# Altium PCB OnkoV1_K.PcbDoc
Units mil, origin at the board's own origin, x right, y up, seen from the top; angles counter-clockwise.
Board outline 5157.48 x 3228.35 mil, 2 copper layers (Top Layer, Bottom Layer); 141 components, 107 nets, 447 pads, 28 vias.
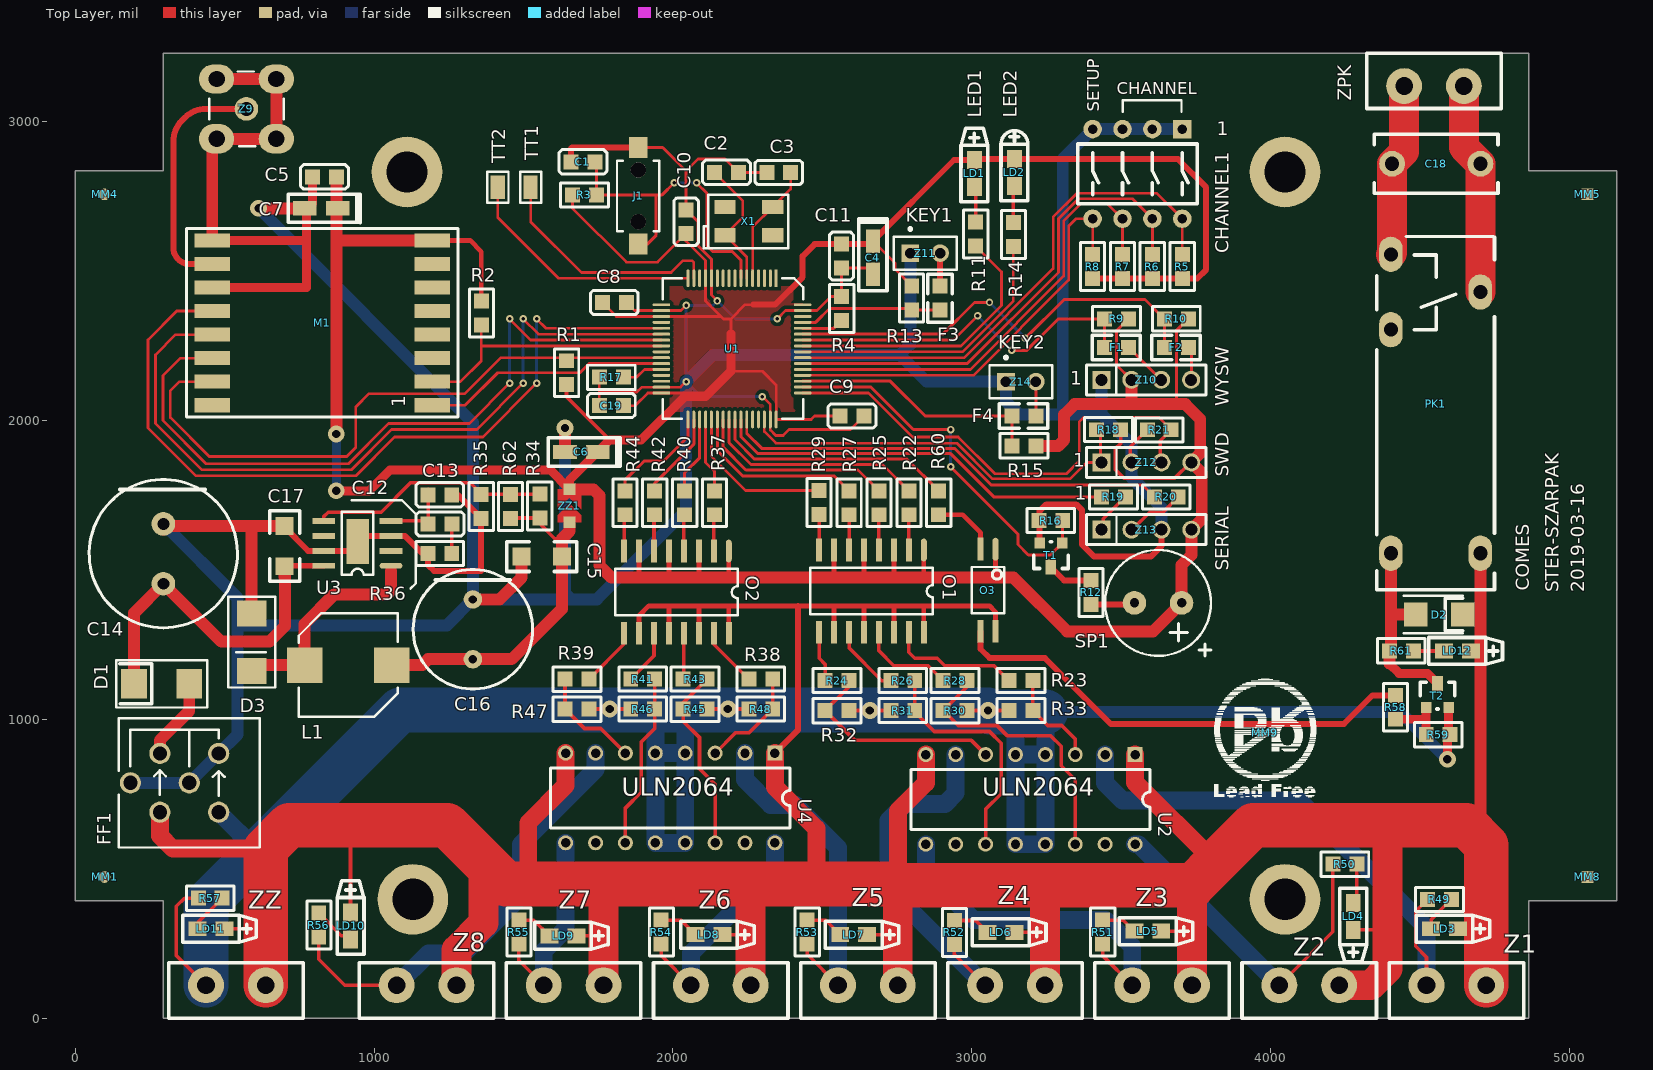
[diagram p0: Top Layer view]
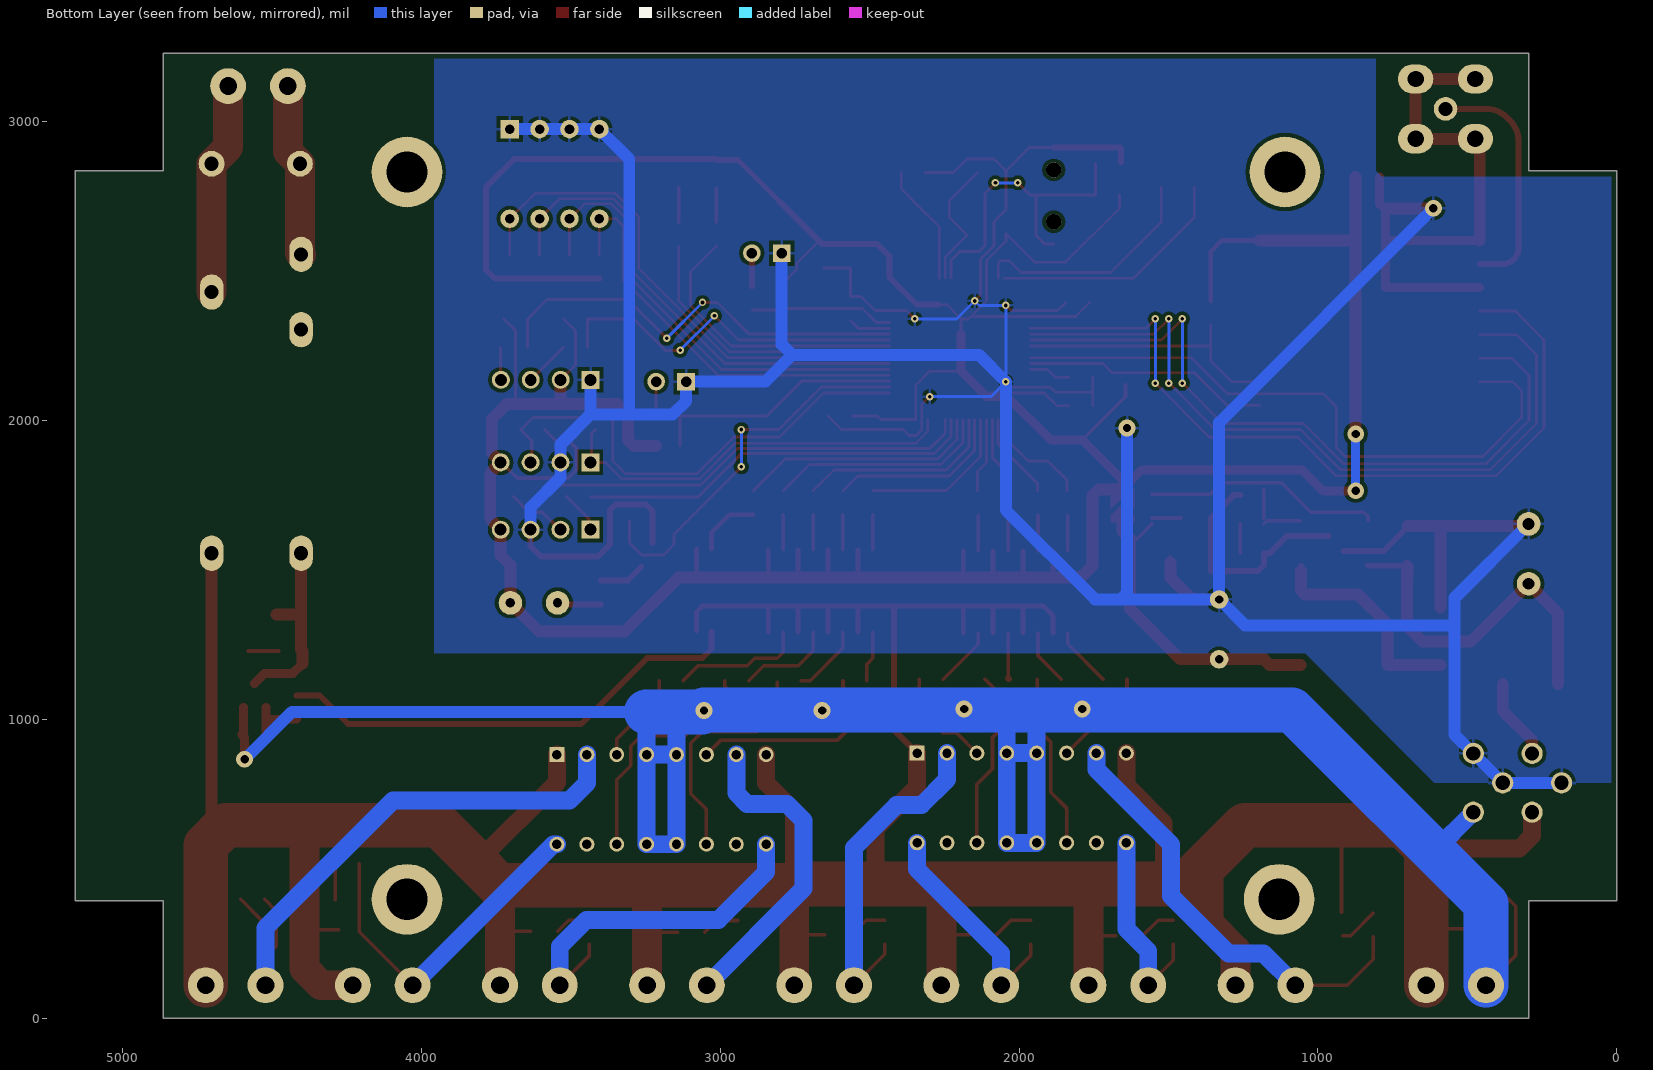
[diagram p1: Bottom Layer view, seen from below]

## Layer stack, top to bottom
Top Layer: signal copper 1.4
Dielectric: dielectric 12.6, FR-4, Dk 4.8
Bottom Layer: signal copper 1.4

## Board outline
295.28,0 295.28,393.7 0,393.7 0,2834.65 295.28,2834.65 295.28,3228.35 4862.2,3228.35 4862.2,2834.65 5157.48,2834.65 5157.48,393.7 4862.2,393.7 4862.2,0

## Design rules (kind name [scope] priority, off if disabled: settings)
Clearance Clearance_Poly [InPolygon vs not (InPolygon)] p1: gap=12
Clearance [All] p2: gap=8
ComponentClearance [All] p1 off: gap=10 collisioncheckmode=3 verticalgap=10 showdistances=FALSE
HoleSize [All] p1: absolutevalues=TRUE maxlimit=196.85 minlimit=11.81 maxpercent=80.000 minpercent=20.000
MinimumSolderMaskSliver [All] p1: minsoldermaskwidth=6
PolygonConnect [All] p1: connectstyle=Relief reliefconductorwidth=10 reliefentries=4 polygonreliefangle="90 Angle"
RoutingVias [All] p1: holewidth=12 width=25 viastyle="Through Hole" minholewidth=12 minwidth=25 maxholewidth=40 maxwidth=100
SilkToSilkClearance [All] p1: silktosilkclearance=6
SilkscreenOverComponentPads [All] p1: minsilkscreentomaskgap=4
SolderMaskExpansion [All] p1: expansion=4
Width [All] p1: maxlimit=200 minlimit=9 preferedwidth=10 toplayer_prefwidth=9 bottomlayer_minwidth=10 minimp=50.000000 maximp=50.000000 favimp=50.000000
23 further rules are at their usual default settings.

## Components (designator, comment, footprint, x,y, rotation, side; value= is the part's Value field where it differs from the comment)
C1 "10n" 0805C 1658.74,2864.17 r0 top
C2 "12pF" 0805C 2138.74,2829.17 r0 top
C3 "12pF" 0805C 2393.74,2829.17 r180 top
C4 "10u/6.3V" CAP_A 2668.74,2488.94 r90 top
C5 "100n" 0805C 793.74,2814.17 r0 top
C6 "10u/6V" CAP_A 1638.74,1894.17 r0 top
C7 "10u/6V" CAP_A 768.74,2709.17 r0 top
C8 "100n" 0805C 1843.74,2394.17 r180 top
C9 "100n" 0805C 2558.74,2014.17 r0 top
C10 "100n" 0805C 2043.74,2704.17 r270 top
C11 "100n" 0805C 2563.74,2509.17 r90 top
C12 "22nF" 0805C 1261.1,1653.54 r180 top
C13 "470p" 0805C 1179.84,1750.71 r0 top
C14 "1000uF/35" RB-.5/.2 295.28,1653.54 r270 top
C15 "4.7uF/16V" 1206 1493.61,1544.39 r0 top
C16 "1000uF/10V" RB-.2/.4 1330.71,1400.79 r90 top
C17 "10uF/35V" 1206 701,1646.94 r270 top
C18 "4n7/3kV" CAP_75 4405.51,2858.27 r180 top
C19 "100n" 0805C 1753.74,2049.17 r0 top
CHANNEL1 "SW_DIP_4_SMD" DIP8-SW 3703.74,2974.17 r180 top
D1 "MB1" SMB 196.85,1118.11 r0 top
D2 "MB1" SMA 4641.73,1350.39 r180 top
D3 "SK26" RD5 590.55,1354.33 r270 top
F1 "BLM18BB141SN1D" 0805L 3523.74,2244.17 r180 top
F2 "BLM18BB141SN1D" 0805L 3723.74,2244.17 r180 top
F3 "BLM18BB141SN1D" 0805L 2893.74,2449.17 r270 top
F4 "BLM18BB141SN1D" 0805L 3213.74,2014.17 r180 top
FF1 "BNX002" BNX002 618.11,1003.94 r0 top
J1 "" DTSM31N_2 1883.74,2750.79 r0 top
L1 "DER0705-15" DER0705_1 767.72,1181.1 r0 top
LD1 "" 0805LG 3008.43,2870.63 r90 top
LD2 "" 0805LR 3142.28,2874.02 r90 top
LD3 "" 0805LG 4625.98,299.21 r0 top
LD4 "" 0805LG 4275.59,295.28 r270 top
LD5 "" 0805LG 3633.31,291.34 r0 top
LD6 "" 0805LG 3141.73,287.4 r0 top
LD7 "" 0805LG 2649.61,279.53 r0 top
LD8 "" 0805LG 2165.35,279.53 r0 top
LD9 "" 0805LG 1677.17,275.59 r0 top
LD10 "" 0805LG 921.26,353.78 r90 top
LD11 "" 0805LG 499.45,299.21 r0 top
LD12 "" 0805LG 4668.74,1228.35 r0 top
M1 "RFM69W" RFM69W 1214.65,2641.02 r180 top
MM1 "" REF_CIR 98.43,472.44 r0 top
MM4 "" REF_CIR 98.43,2755.91 r90 top
MM5 "" REF_SQR 5059.06,2755.91 r90 top
MM8 "" REF_SQR 5059.06,472.44 r90 top
MM9 "" PB_FREE_GRAF 3978.74,954.17 r0 top
O1 "TCMT4600" SMD16AB 2838.98,1566.34 r0 top
O2 "TCMT4600" SMD16AB 2186.61,1562.99 r0 top
O3 "TCMT1600" SMD4AB 3078.74,1569.17 r180 top
PK1 "RM96" RM96A 4401.57,1555.12 r90 top
R1 "10k" 0805R 1643.74,2199.17 r270 top
R2 "10k" 0805R 1358.74,2399.17 r270 top
R3 "10k" 0805R 1743.74,2754.17 r180 top
R4 "10k" 0805R 2563.74,2414.17 r270 top
R5 "10k" 0805R 3703.74,2474.17 r90 top
R6 "10k" 0805R 3603.74,2474.17 r90 top
R7 "10k" 0805R 3503.74,2474.17 r90 top
R8 "10k" 0805R 3403.74,2474.17 r90 top
R9 "10k" 0805R 3443.74,2339.17 r0 top
R10 "10k" 0805R 3643.74,2339.17 r0 top
R11 "4k7" 0805R 3012.36,2663.23 r270 top
R12 "10R" 0805R 3398.74,1384.17 r90 top
R13 "10k" 0805R 2798.74,2369.17 r90 top
R14 "4k7" 0805R 3138.35,2661.97 r270 top
R15 "10k" 0805R 3133.74,1914.17 r0 top
R16 "10k" 0805R 3223.74,1664.17 r0 top
R17 "10k" 0805R 1833.74,2144.17 r180 top
R18 "10k" 0805R 3417.32,1968.5 r0 top
R19 "33R" 0805R 3513.07,1744.09 r180 top
R20 "33R" 0805R 3690.24,1744.09 r180 top
R21 "10k" 0805R 3666.61,1968.5 r180 top
R22 "1k" 0805R 2788.74,1764.17 r270 top
R23 "1k" 0805R 3123.74,1129.17 r0 top
R24 "1k" 0805R 2508.74,1129.17 r0 top
R25 "1k" 0805R 2688.74,1764.17 r270 top
R26 "1k" 0805R 2728.74,1129.17 r0 top
R27 "1k" 0805R 2588.74,1764.17 r270 top
R28 "1k" 0805R 2903.74,1129.17 r0 top
R29 "1k" 0805R 2488.19,1765.04 r270 top
R30 "1k" 0805R 2983.74,1029.17 r180 top
R31 "1k" 0805R 2728.74,1029.17 r0 top
R32 "1k" 0805R 2588.74,1029.17 r180 top
R33 "1k" 0805R 3123.74,1029.17 r0 top
R34 "*" 0805R 1555.12,1673.23 r90 top
R35 "1k5" 0805R 1358.27,1751.97 r270 top
R36 "4k7" 0805R 1259.84,1555.12 r180 top
R37 "1k" 0805R 2138.74,1764.17 r270 top
R38 "1k" 0805R 2253.74,1134.17 r0 top
R39 "1k" 0805R 1718.74,1134.17 r180 top
R40 "1k" 0805R 2038.74,1764.17 r270 top
R41 "1k" 0805R 1858.74,1134.17 r0 top
R42 "1k" 0805R 1938.74,1764.17 r270 top
R43 "1k" 0805R 2033.74,1134.17 r0 top
R44 "1k" 0805R 1838.74,1764.17 r270 top
R45 "1k" 0805R 2113.74,1034.17 r180 top
R46 "1k" 0805R 1858.74,1034.17 r0 top
R47 "1k" 0805R 1718.74,1034.17 r180 top
R48 "1k" 0805R 2253.74,1034.17 r0 top
R49 "10k" 0805R 4603.62,397.64 r180 top
R50 "10k" 0805R 4287.4,515.75 r180 top
R51 "10k" 0805R 3437.01,328.03 r270 top
R52 "10k" 0805R 2940.94,326.77 r270 top
R53 "10k" 0805R 2448.82,328.03 r270 top
R54 "10k" 0805R 1960.63,328.03 r270 top
R55 "10k" 0805R 1484.25,328.03 r270 top
R56 "10k" 0805R 814.96,351.65 r270 top
R57 "10k" 0805R 492.13,401.57 r180 top
R58 "1k" 0805R 4417.32,1000 r90 top
R59 "1k" 0805R 4599.69,948.82 r180 top
R60 "1k" 0805R 2888.74,1764.17 r270 top
R61 "10k" 0805R 4396.38,1228.35 r0 top
R62 "*" 0805R 1456.69,1671.97 r90 top
SP1 "LD-BZEN-0903" LD-BZEN-0903 3701.22,1389.17 r180 top
T1 "2N7002" SOT23 3262.74,1502.17 r270 top
T2 "2N7002" SOT23 4558.69,1126.37 r90 top
TT1 "PIN" PP_SMD1 1523.74,2779.17 r90 top
TT2 "PIN" PP_SMD1 1413.74,2779.17 r90 top
U1 "STM32F103RBT6" LQFP64(10X10) 2345.16,2475.24 r180 top
U2 "ULN2064" DIP16 3545.67,881.89 r180 top
U3 "L5973D_2" SO8_M 1056.88,1513.49 r90 top
U4 "ULN2064" DIP16 2340.94,886.61 r180 top
X1 "8MHz" XTAL3 2173.54,2619.17 r0 top
Z1 "ZL-2" TLPH300R_2 4720.47,110.24 r180 top
Z2 "ZL-2" TLPH300R_2 4228.35,110.24 r180 top
Z3 "ZL-2" TLPH300R_2 3736.22,110.24 r180 top locked
Z4 "ZL-2" TLPH300R_2 3244.09,110.24 r180 top locked
Z5 "ZL-2" TLPH300R_2 2751.97,110.24 r180 top locked
Z6 "ZL-2" TLPH300R_2 2259.84,110.24 r180 top locked
Z7 "ZL-2" TLPH300R_2 1767.72,110.24 r180 top locked
Z8 "ZL-2" TLPH300R_2 1275.59,110.24 r180 top locked
Z9 "SMA-20" MCX_KAT 573.23,3041.73 r90 top
Z10 "WYSW" PIN4 3433.27,2135.47 r0 top
Z11 "CON2" PIN2 2793.74,2559.17 r0 top
Z12 "NCDW-04" PIN4 3433.74,1859.17 r0 top
Z13 "CON4" PIN4 3433.74,1634.17 r0 top
Z14 "CON2" PIN2 3113.74,2129.17 r0 top
ZPK "ZL-2" TLPH300R_2 4445.67,3118.11 r0 top
ZZ "ZL-2" TLPH300R_2 637.8,110.24 r180 top locked
ZZ1 "ZWORA" ZW3 1653.74,1658.94 r90 top

## Footprints (in the part's own frame and the unit in brackets; to place one, negate y for a bottom-side part, rotate by r counter-clockwise, add the part's x,y. Pads: shape width x height; smd on the part's side, far side on the other; paste and mask are expansions set on the pad)
0805C [mil]
  rect 50x50 smd: 1(0,0) 2(80,0)
  silkscreen extent -40,-40 120,41
0805L [mil]
  rect 50x50 smd: 1(0,0) 2(80,0)
  silkscreen extent -40,-41 122,41
0805LG [mil]
  rect 60x50 smd: A(0,0) K(-90,0)
  silkscreen extent -140,-45 106,45
0805LR [mil]
  rect 60x50 smd: A(0,0) K(-90,0)
  silkscreen extent -140,-45 95,45
0805R [mil]
  rect 50x50 smd: 1(0,0) 2(80,0)
  silkscreen extent -40,-40 120,41
1206 [mil]
  rect 60x60 smd: 1(0.13,-0.21) 2(135.13,-0.21)
  silkscreen extent -50,-50 185,50
BNX002 [mm]
  round 1.8 hole 1.2: B(-8.5,-8) CB(-8.5,-3) CG1(-3.5,-3) CG2(-6,-5.5) CG3(-11,-5.5) PSG(-3.5,-8)
  silkscreen extent -12,-11 0,0
CAP_75 [mm]
  round 2.2 hole 1.2: 1(0,0) 2(-7.5,0)
  silkscreen extent -9,-2.5 1.5,2.5
CAP_A [mm]
  rect 2x1.2 smd: 1(0,0) 2(2.8,0)
  silkscreen extent -1.42,-1.21 4.7,1.2
DER0705_1 [mm]
  rect 3x3 smd: 1(0,0) 2(7.4,0)
  silkscreen extent -0.5,-4.4 7.9,4.4
DIP8-SW [mil]
  rect 62x62 hole 32: 1(0,0)
  round 62 hole 32: 2(100,0) 3(200,0) 4(300,0) 5(300,300) 6(200,300) 7(100,300) 8(0,300)
  silkscreen extent -50,50 350,250
DIP16 [mm]
  rect 1.27x1.27 hole 0.8: 1(0,0)
  round 1.27 hole 0.8: 2(2.54,0) 3(5.08,0) 4(7.62,0) 5(10.16,0) 6(12.7,0) 7(15.24,0) 8(17.78,0) 9(17.78,7.62) 10(15.24,7.62) 11(12.7,7.62) 12(10.16,7.62) 13(7.62,7.62) 14(5.08,7.62) 15(2.54,7.62) 16(0,7.62)
  silkscreen extent -1.27,1.27 19.05,6.35
DTSM31N_2 [mm]
  round 1.3 hole 1.3 mask+0: 0(0,-2.2) 0(0,2.2)
  rect 1.6x1.8 smd: 1(0,4.1) 2(0,-4.1)
  silkscreen extent -1.8,-3 1.8,3
LD-BZEN-0903 [mm]
  round 2 hole 0.8: 1(0,0) 2(4,0)
  silkscreen extent -2.5,-4.5 6.5,4.5
LQFP64(10X10) [mm]
  rect 0.25x1.5 smd mask+0.152: 1(0,0)
  oval 0.25x1.5 smd mask+0.152: 2(0.5,0) 3(1,0) 4(1.5,0) 5(2,0) 6(2.5,0) 7(3,0) 8(3.5,0) 9(4,0) 10(4.5,0) 11(5,0) 12(5.5,0) 13(6,0) 14(6.5,0) 15(7,0) 16(7.5,0) 33(7.5,12) 34(7,12) 35(6.5,12) 36(6,12) 37(5.5,12) 38(5,12) 39(4.5,12) 40(4,12) 41(3.5,12) 42(3,12) 43(2.5,12) 44(2,12) 45(1.5,12) 46(1,12) 47(0.5,12) 48(0,12)
  oval 1.5x0.25 smd mask+0.152: 17(9.75,2.25) 18(9.75,2.75) 19(9.75,3.25) 20(9.75,3.75) 21(9.75,4.25) 22(9.75,4.75) 23(9.75,5.25) 24(9.75,5.75) 25(9.75,6.25) 26(9.75,6.75) 27(9.75,7.25) 28(9.75,7.75) 29(9.75,8.25) 30(9.75,8.75) 31(9.75,9.25) 32(9.75,9.75) 49(-2.25,9.75) 50(-2.25,9.25) 51(-2.25,8.75) 52(-2.25,8.25) 53(-2.25,7.75) 54(-2.25,7.25) 55(-2.25,6.75) 56(-2.25,6.25) 57(-2.25,5.75) 58(-2.25,5.25) 59(-2.25,4.75) 60(-2.25,4.25) 61(-2.25,3.75) 62(-2.25,3.25) 63(-2.25,2.75) 64(-2.25,2.25)
  silkscreen extent -2.29,0 9.65,11.94
MCX_KAT [mm]
  round 2 hole 1.2: 1(0,0)
  oval 2.5x3 hole 1.4: G1(-2.54,-2.54) G2(-2.54,2.54) G3(2.54,2.54) G4(2.54,-2.54)
  silkscreen extent -3.17,-3.18 3.17,3.17
PB_FREE_GRAF [mil]
  silkscreen extent -169,-215 174,181
PIN2 [mm] "Photosensitive Diode; 2 Leads"
  rect 1.5x1.5 hole 0.9: 1(0,0)
  round 1.5 hole 0.9: 2(2.54,0)
  silkscreen extent -1.4,-1.4 3.94,2.17
PIN4 [mil]
  rect 60x60 hole 40: 1(0,0)
  round 60 hole 40: 2(100,0) 3(200,0) 4(300,0)
  silkscreen extent -50,-50 350,50
PP_SMD1 [mm]
  rect 2x1.2 smd: 1(0,0)
  silkscreen extent -1.32,-0.91 1.32,0.89
RB-.2/.4 [mil]
  round 62 hole 28: 1(0,0) 2(-200,0)
  silkscreen extent -300,-200 100,200
RB-.5/.2 [mm]
  round 2 hole 1: 1(0,0) 2(5.08,0)
  silkscreen extent -3.77,-6.3 8.83,6.3
RD5 [mm]
  rect 2.2x2.5 smd: A(0,0) K(4.9,0)
  silkscreen extent -1.4,-2 6.3,2
REF_CIR [mm]
  round 1 smd paste-0.5 mask+0.5: ""(0,0)
REF_SQR [mm]
  rect 1x1 smd paste-0.5 mask+0.5: ""(0,0)
RFM69W [mm]
  rect 3x1.2 smd: 1(0.5,15) 2(0.5,13) 3(0.5,11) 4(0.5,9) 5(0.5,7) 6(0.5,5) 7(0.5,3) 8(0.5,1) 9(19.2,1) 10(19.2,3) 11(19.2,5) 12(19.2,7) 13(19.2,9) 14(19.2,11) 15(19.2,13) 16(19.2,15)
  silkscreen extent -1.7,0 21.4,16
RM96A [mm]
  oval 3x2 hole 1.2: 1(0,0) 2(0,-7.6) 3(19,0) 4(22.2,-7.6) 5(25.4,0)
  silkscreen extent -3.1,-8.8 26.9,1.2
SMA [mm]
  rect 2x2 smd: A(4,0) K(0,0)
  silkscreen extent 0,-1.6 5,1.6
SMB [mm]
  rect 2.2x2.5 smd: A(4.7,0) K(0,0)
  silkscreen extent -1.52,-2 6.22,2
SMD4AB [mil]
  oval 20x76 smd: 1(0,0)
  rect 20x76 smd: 2(50,0) 3(50,275) 4(0,275)
  silkscreen extent -30,60 80,215
SMD16AB [mil]
  oval 20x76 smd: 1(0,0)
  rect 20x76 smd: 2(-50,0) 3(-100,0) 4(-150,0) 5(-200,0) 6(-250,0) 7(-300,0) 8(-350,0) 9(-350,-275) 10(-300,-275) 11(-250,-275) 12(-200,-275) 13(-150,-275) 14(-100,-275) 15(-50,-275) 16(0,-275)
  silkscreen extent -380,-215 30,-60
SO8_M [mil]
  oval 20x76 smd: 1(0,0)
  rect 20x76 smd: 2(50,0) 3(100,0) 4(150,0) 5(150,225) 6(100,225) 7(50,225) 8(0,225)
  rect 150x75 smd: 9(81,112)
  silkscreen extent -30,60 180,165
SOT23 [mil]
  rect 36x36 smd: 1(-87,39) 2(-87,-36)
  rect 50x36 smd: 3(-7,1)
  silkscreen extent -92,-56 -2,59
TLPH300R_2 [mil]
  round 120 hole 59: 1(0,0) 2(200,0)
  silkscreen extent -125,-75 325,110
XTAL3 [mm]
  rect 1.8x1.2 smd: 1(0,0) 2(4.069,0) 3(4.069,2.4) 4(0,2.4)
  silkscreen extent -1.79,-1.1 5.38,3.43
ZW3 [mm]
  rect 1x1 smd: 1(0,0) 2(2.8,0)
  Top Layer region: 1.6,0 0.6,1 0,1 0,-1 0.6,-1
  Top Layer region: 2.1,0 1.1,-1 2.8,-1 2.8,1 1.1,1

## Part data
C1 C2 C3 C5 C8 C9 C10 C11 C12 C13 C19: library part CAP, "Capacitor"
C4 C6 C7: library part CAP_TANTAL_SMD, "KONDENSATOR ELEKTROLITYCZNY TANTALOWY SMD"
C14 C16: library part CapTantal
C15 C17 C18: library part CAP
CHANNEL1: library part "SW DIP-4", "DIP Switch"
D1 D2: library part Diode, "Default Diode"
D3: library part "DIODE SCHOTTKY", "Schottky Diode"
F1 F2 F3 F4: library part KORALIK, "Koralik ferrytowy"
J1: library part SW1
L1: library part CEWKA_1
LD1 LD2 LD3 LD4 LD5 LD6 LD7 LD8 LD9 LD10 LD11 LD12: library part LED
M1: library part RFM96W
MM1 MM4 MM5 MM8 MM9: library part MECH
O1 O2: library part TLP281-4
O3: library part TLP291
R1 R2 R5 R6 R7 R8 R17 R19 R20: library part RES1
R3 R4 R9 R10 R11 R12 R13 R14 R15 R16 R18 R21 R22 R23 R24 R25 R26 R27 R28 R29 R30 R31 R32 R33 R34 R35 R36 R37 R38 R39 R40 R41 R42 R43 R44 R45 R46 R47 R48 R49 R50 R51 R52 R53 R54 R55 R56 R57 R58 R59 R60 R61 R62: library part RES3
SP1: library part Speaker, "Loudspeaker"
T1 T2: library part MOSFET-P_1_1
U1: library part STM32F103R6T6
X1: library part CRYSTAL, "Crystal"
Z10: library part CON4, "Connector"
Z11 Z13 Z14: "Connector"
Z12: library part SW_CON, "Header, 4-Pin"

## Free pads (board coordinates)
  round 236.22 hole 137.8: 0(1110.24,2830.71) 0(1129.92,397.64) 0(4047.24,397.64)
  round 236.22 hole 137.79: 0(4047.24,2830.71)

## Via types
v1: diameter 25, hole 12, Top Layer to Bottom Layer, tented both sides, 19 vias
v2: diameter 56, hole 28, Top Layer to Bottom Layer, tented both sides, 9 vias

## Nets (pads, with @x,y where several pads share a name; then routed paths per layer and width w, separated by ;. In a path a pad name is that pad's centre, name@x,y a point inside that pad or via, vN(x,y) a via of type N, cw(c..) or ccw(c..) an arc to the next point about the centre after c; other vN are vias at no path point)
ANT: M1.10 Z9.1 | length 822
  Top Layer w20: M1.10 382.69,2522.91 cw(c382.69,2576.87) 328.74,2576.87 328.74,2932.75 cw(c428.74,2932.75) 358.03,3003.46 367.01,3012.44 cw(c437.72,2941.73) 437.72,3041.73 Z9.1
BOOT: R4.2 U1.60 | length 140.9
  Top Layer w10: U1.60 2537.48,2307.91 R4.2
BUZZER: R16.2 T1.1 U1.50 | length 1286.9
  Top Layer w10: U1.50 2661.85,2111.06 2803.74,1969.17 v1(2928.74,1969.17) ; v1(2928.74,1844.17) 3153.74,1619.17 3153.74,1584.17 3188.74,1549.17 3261.74,1549.17 T1.1 3303.74,1591.17 R16.2
  Bottom Layer w10: v1(2928.74,1844.17) v1(2928.74,1969.17)
CH0: CHANNEL1.8 R5.2 U1.55 | length 1754.5
  Top Layer w9: U1.55 2434.06,2209.17 2973.74,2209.17 3271.74,2507.17 3271.74,2680.26 3350.66,2759.17 3618.74,2759.17 CHANNEL1.8 R5.2
CH1: CHANNEL1.7 R6.2 U1.54 | length 1651
  Top Layer w9: U1.54 2984.37,2189.8 3289.74,2495.17 3289.74,2674.21 3356.7,2741.17 3536.74,2741.17 CHANNEL1.7 R6.2
CH2: CHANNEL1.6 R7.2 U1.53 | length 1548.6
  Top Layer w9: U1.53 2994.69,2170.12 3306.74,2482.17 3306.74,2667.17 3363.74,2724.17 3453.74,2724.17 CHANNEL1.6 R7.2
CH3: CHANNEL1.5 R8.2 U1.52 | length 1412.4
  Top Layer w9: U1.52 3005,2150.43 3323.74,2469.17 3323.74,2649.17 3348.74,2674.17 CHANNEL1.5 R8.2
CS_R: M1.15 R1.1 U1.26 | length 2154.8
  Top Layer w9: M1.15 348.78,2129.21 318.74,2099.17 318.74,2009.17 448.74,1879.17 908.74,1879.17 938.74,1909.17 938.74,2044.17 983.74,2089.17 1303.74,2089.17 1424.06,2209.49 U1.26
GND: C1.1 C2.2 C3.2 C4.1 C5.1 C6.1 C7.1 C8.1 C9.2 C10.1 C11.1 C13.2 C14.1 C15.1 C16.1 C17.1 C19.1 CHANNEL1.1 CHANNEL1.2 CHANNEL1.3 CHANNEL1.4 D3.A FF1.CG1 FF1.CG2 FF1.CG3 J1.1 M1.9 M1.11 R4.1 R16.1 R17.2 R21.2 R35.2 R36.2 T1.2 U1.12 U1.18 U1.31 U1.47 U1.63 U3.3 U3.7 U3.9 Z9.G1 Z9.G2 Z9.G3 Z9.G4 Z10.1 Z11.1 Z12.2 Z13.3 Z14.1 | length 17958.8
  Top Layer w9: C19.1 1753.74,2099.17 ; R17.2 1753.74,2099.17 ; v1(2043.74,2129.17) 2025.63,2111.06 U1.31 1895.63,2111.06 1878.74,2094.17 1758.74,2094.17 1753.74,2099.17 ; v1(2298.74,2079.17) 2325.47,2052.44 U1.47 2325.47,1967.44 2343.74,1949.17 2368.74,1949.17 2388.74,1969.17 2593.74,1969.17 C9.2
  Top Layer w10: C8.1 1870.95,2366.97 U1.18 2026.54,2366.97 v1(2043.74,2384.17) ; J1.1 1965.71,2912.2 2043.74,2834.17 ; v1(2148.74,2399.17) 2128.62,2419.29 U1.12 2128.62,2539.04 2083.74,2583.92 2083.74,2664.17 C10.1 2043.74,2834.17 ; C3.2 C2.2 2173.74,2874.17 2083.74,2874.17 2043.74,2834.17 ; v1(2348.74,2339.17) 2376.54,2366.97 U1.63 2481.54,2366.97 2528.74,2414.17 R4.1 C11.1 C4.1@2653.98,2509.17
  Top Layer w12: C15.1@1493.74,1524.17 C15.1 ; Z12.2@3529.92,1858.27 3529.92,1911.81 R21.2
  Top Layer w20: C17.1 700.79,1641.73 779.03,1563.49 U3.7 U3.9@913.88,1563.49 ; U3.9@963.88,1613.49 U3.3 1103.05,1613.49 1161.42,1555.12 R36.2 1181.1,1553.86 1181.1,1515.75 1200.79,1496.06 1358.27,1496.06 R35.2 1279.53,1750.71 C13.2 ; C1.1 1658.74,2909.17 1661.77,2912.2 J1.1 ; T1.2 3226.74,1697.17 3248.74,1719.17 3348.74,1719.17 3368.74,1699.17 3368.74,1584.17 3408.74,1544.17 3598.74,1544.17 3633.74,1579.17 Z13.3
  Top Layer w30: M1.11 773.74,2444.17 773.74,2704.17 793.74,2724.17 C5.1 ; M1.9 771.22,2601.65
  Top Layer w40: C14.1@295.28,1633.86 308.23,1646.81 590.55,1646.81 ; M1.9 458.74,2927.24 Z9.G2 Z9.G1 Z9.G4 Z9.G3 ; D3.A@590.55,1374.02 590.55,1646.81 ; v2(613.74,2709.17) C7.1 ; C17.1 590.55,1646.81 ; C16.1 1420.35,1400.79 1493.74,1474.17 C15.1@1493.74,1524.17 ; C6.1 v2(1638.74,1974.17)
  Bottom Layer w10: v1(2298.74,2079.17) 2093.74,2079.17 v1(2043.74,2129.17) v1(2043.74,2384.17) 2133.74,2384.17 v1(2148.74,2399.17) 2208.74,2339.17 v1(2348.74,2339.17)
  Bottom Layer w40: FF1.CG3 FF1.CG2 FF1.CG1 543.31,948.82 543.31,1314.17 ; C14.1 543.31,1405.51 543.31,1314.17 ; v2@608.74,2714.17 v2(613.74,2709.17) 1330.71,1992.2 C16.1 ; v2(1638.74,1974.17) 1638.74,1420.79 1658.74,1400.79 ; Z11.1 2793.74,2254.17 2758.74,2219.17 ; Z10.1 3433.27,2019.65 ; Z13.3 3633.74,1708.78 3533.74,1808.78 Z12.2 3533.74,1919.17 3433.27,2019.65 ; CHANNEL1.1 CHANNEL1.2 CHANNEL1.3 CHANNEL1.4 3303.74,2874.17 3303.74,2019.65 ; 543.31,1314.17 1244.09,1314.17 C16.1 ; C16.1 1658.74,1400.79 ; 1658.74,1400.79 1745.35,1400.79 2043.74,1699.17 v1(2043.74,2129.17) 2133.74,2219.17 2758.74,2219.17 ; 2758.74,2219.17 2848.74,2129.17 Z14.1 3113.74,2064.17 3158.27,2019.65 3303.74,2019.65 ; 3303.74,2019.65 3433.27,2019.65
GND_Z: FF1.PSG R30.1 R31.1 R32.1 R33.1 R45.1 R46.1 R47.1 R48.1 R57.2 R59.1 T2.2 U2.4 U2.5 U2.12 U2.13 U4.4 U4.5 U4.12 U4.13 ZZ.2 | length 8240.5
  Top Layer w12: R57.2 366.14,401.57 338.58,374.02 338.58,209.45 ZZ.2 ; R47.1 v2(1788.74,1034.17) R46.1 ; R45.1 v2(2183.74,1034.17) R48.1 ; R32.1 v2(2658.74,1029.17) R31.1 ; R30.1 v2(3053.74,1029.17) R33.1
  Top Layer w30: v2(4590.55,866.14) 4590.55,939.68 R59.1 ; R59.1@4594.69,953.82 T2.2
  Bottom Layer w40: 3245.67,1024.41 4432.28,1024.41 v2(4590.55,866.14)
  Bottom Layer w60: FF1.PSG 610.24,559.06 ; 1940.94,1031.5 U4.5 ; 2040.94,1029.13 U4.4 ; 3145.67,1024.41 U2.5 ; 3245.67,1024.41 U2.4 ; U4.5 U4.4 ; U4.5 U4.12 U4.13 U4.4 ; U2.5 U2.12 U2.13 U2.4 ; U2.5 U2.4
  Bottom Layer w150: ZZ.2 437.8,382.68 1086.61,1031.5 1940.94,1031.5 3053.74,1031.5 3060.83,1024.41 3145.67,1024.41 3245.67,1024.41
INT_R: M1.2 R2.2 U1.24 | length 915.3
  Top Layer w9: M1.2 1288.78,2129.21 1358.74,2199.17 R2.2 ; 1358.74,2248.86 U1.24
K_1: R22.1 U1.40 | length 745.3
  Top Layer w10: U1.40 2187.68,1925.24 2260.74,1852.17 2700.74,1852.17 R22.1
K_2: R25.1 U1.39 | length 674
  Top Layer w10: U1.39 2167.99,1909.92 2243.74,1834.17 2618.74,1834.17 R25.1
K_3: R27.1 U1.38 | length 600.3
  Top Layer w10: U1.38 2148.31,1898.69 2232.83,1814.17 2538.74,1814.17 R27.1
K_4: R29.1 U1.37 | length 530.4
  Top Layer w10: U1.37 2128.62,1879.29 2242.87,1765.04 R29.1
K_5: R37.1 U1.36 | length 251
  Top Layer w9: U1.36 2108.94,1858.98 2138.74,1829.17 R37.1
K_6: R40.1 U1.35 | length 259.5
  Top Layer w10: R40.1 2038.74,1824.17 2089.25,1874.69 U1.35
K_7: R42.1 U1.34 | length 292.8
  Top Layer w10: R42.1 1938.74,1789.17 2069.57,1920 U1.34
K_8: R44.1 U1.33 | length 364.2
  Top Layer w10: R44.1 1838.74,1799.17 1903.74,1864.17 1968.74,1864.17 2049.88,1945.32 U1.33
K_A1: O1.15 R23.1 | length 441.4
  Top Layer w12: O1.15 2788.98,1223.94 2808.74,1204.17 2883.74,1204.17 2908.74,1179.17 3073.74,1179.17 R23.1
K_A2: O1.13 R28.1 | length 318.5
  Top Layer w12: O1.13 2688.98,1228.94 2738.74,1179.17 2853.74,1179.17 R28.1
K_A3: O1.11 R26.1 | length 237.6
  Top Layer w12: O1.11 2588.98,1238.94 2698.74,1129.17 R26.1
K_A4: O1.9 R24.1 | length 170.4
  Top Layer w12: O1.9 2488.98,1203.94 2508.74,1184.17 R24.1
K_A5: O2.15 R38.1 | length 202.3
  Top Layer w12: O2.15 2136.61,1251.3 R38.1
K_A6: O2.13 R43.1 | length 155
  Top Layer w12: R43.1@2036.61,1137.05 O2.13
  Top Layer w20: R43.1 R43.1@2036.61,1137.05
K_A7: O2.11 R41.1 | length 186.1
  Top Layer w12: R41.1 1936.61,1212.05 O2.11
K_A8: O2.9 R39.1 | length 202.6
  Top Layer w12: R39.1 1836.61,1252.05 O2.9
K_B1: R49.2 U2.2 Z1.2 | length 1881.5
  Top Layer w12: Z1.2 4520.47,203.94 4484.25,240.16 4484.25,358.27 R49.2
  Bottom Layer w60: U2.2 3445.67,786.61 3503.94,728.35 4094.49,728.35 4520.47,302.36 Z1.2
K_B2: R50.2 U2.16 Z2.2 | length 1157.7
  Top Layer w12: Z2.2 4207.4,289.29 R50.2
  Bottom Layer w60: U2.16 3556.69,581.89 Z2.2
K_B3: R51.2 U2.9 Z3.2 | length 1194.9
  Top Layer w12: R51.2 3437.01,209.45 Z3.2
  Bottom Layer w60: U2.9 2845.67,488.98 3005.47,329.17 3446.42,329.17 3536.22,239.37 Z3.2
K_B4: R52.2 U2.7 Z4.2 | length 1256.7
  Top Layer w12: R52.2 2940.94,213.39 Z4.2
  Bottom Layer w60: U2.7 2945.67,752.76 2909.45,716.54 2775.59,716.54 2720.47,661.42 2720.47,433.86 Z4.2
K_B5: R53.2 U4.2 Z5.2 | length 1134.2
  Top Layer w12: R53.2 2448.82,213.39 Z5.2
  Bottom Layer w60: U4.2 2240.94,798.43 2326.77,712.6 2409.45,712.6 2551.97,570.08 Z5.2
K_B6: R54.2 U4.16 Z6.2 | length 771.7
  Top Layer w12: R54.2 1960.63,209.45 Z6.2
  Bottom Layer w60: Z6.2 2059.84,217.32 2340.94,498.43 U4.16
K_B7: R55.2 U4.9 Z7.2 | length 679.1
  Top Layer w12: R55.2 1484.25,193.7 Z7.2
  Bottom Layer w60: Z7.2 1567.72,225.2 1640.94,298.43 U4.9
K_B8: R56.2 U4.7 Z8.2 | length 1492
  Top Layer w12: R56.2 814.96,196.85 901.57,110.24 Z8.2
  Bottom Layer w60: Z8.2 1181.89,216.54 1299.21,216.54 1491.24,408.56 1491.24,581.67 1740.94,831.38 U4.7
KEY1: F3.2 R13.1 U1.61 | length 481.4
  Top Layer w10: U1.61 2477.17,2327.6 2523.74,2374.17 2793.74,2374.17 R13.1 F3.2
KEY2: F4.2 R15.1 U1.51 | length 848.3
  Top Layer w10: U1.51 2727.17,2130.75 2843.74,2014.17 F4.2 R15.1
LED1: R11.2 U1.57 | length 955.9
  Top Layer w9: U1.57 2963.43,2248.86 3098.74,2384.17 3098.74,2496.85 R11.2
LED2: R14.2 U1.56 | length 958
  Top Layer w9: U1.56 2968.74,2229.17 3138.35,2398.78 R14.2
LX: D3.K L1.1 U3.1 | length 733.1
  Top Layer w20: 1056.88,1496.06 U3.1
  Top Layer w40: D3.K@590.55,1181.1 L1.1 767.72,1318.9 866.14,1417.32 1043.31,1417.32 1056.88,1430.9 1056.88,1496.06
NetC2_1: C2.1 U1.6 X1.1 | length 448.5
  Top Layer w9: C2.1 2233.74,2734.17 2233.74,2679.38 X1.1 2246.73,2545.98 U1.6
NetC3_1: C3.1 U1.5 X1.3 | length 406.7
  Top Layer w9: U1.5 2266.42,2646.34 X1.3 2393.74,2773.66 C3.1
NetC12_1: C12.1 R36.1 | length 98.4
  Top Layer w12: R36.1 C12.1@1259.84,1653.54
NetC12_2: C12.2 C13.1 U3.4 | length 224.2
  Top Layer w12: U3.4 1171.16,1663.49 C12.2 ; C12.2@1181.1,1673.23 C13.1@1181.1,1769.13
NetC14_2: C14.2 C17.2 D1.K U3.8 | length 1253.5
  Top Layer w20: C17.2@702.46,1513.49 U3.8
  Top Layer w40: D1.K 196.85,1355.12 C14.2 488.98,1259.84 649.61,1259.84 702.46,1312.7 702.46,1478.06 ; C17.2 700.79,1476.38 702.46,1478.06 ; C17.2@702.46,1513.49 702.46,1478.06
NetC15_2: C15.2 C16.2 L1.2 R34.1 R62.1 ZZ1.1 | length 1140.7
  Top Layer w12: R62.1@1457.95,1673.23 R34.1 R34.1@1553.86,1671.97 ; R34.1@1555.12,1653.54 1604.49,1604.17 1628.74,1604.17
  Top Layer w40: L1.2 1161.42,1181.1 1181.1,1200.79 C16.2 1460.35,1200.79 1628.74,1369.17 C15.2 1628.74,1604.17 1653.74,1629.17 ZZ1.1
NetC18_1: C18.1 PK1.5 ZPK.1 | length 581.3
  Top Layer w100: PK1.5 4405.51,2559.06 C18.1 4445.67,2898.43 ZPK.1
NetC18_2: C18.2 PK1.4 ZPK.2 | length 711.8
  Top Layer w100: ZPK.2 4645.67,2913.39 C18.2 PK1.4
NetD2_A: D2.A PK1.1 R61.1 T2.3 | length 749
  Top Layer w30: 4396.38,1186.3 4429.13,1153.54 4523.51,1153.54 T2.3
  Top Layer w40: 4396.38,1186.3 R61.1 4401.57,1233.54 4401.57,1350.39 ; 4401.57,1448.82 PK1.1 4401.57,1350.39 ; D2.A 4401.57,1350.39
NetF1_1: F1.1 Z10.3 | length 154.6
  Top Layer w10: F1.1 3632.44,2135.47 Z10.3
NetF2_1: F2.1 Z10.4 | length 108.2
  Top Layer w10: Z10.4@3733.74,2135.94 F2.1@3733.74,2244.17
NetF3_1: F3.1 Z11.2 | length 110
  Top Layer w20: F3.1 Z11.2
NetF4_1: F4.1 Z14.2 | length 115
  Top Layer w10: F4.1 Z14.2
NetLD1_K: LD1.K R11.1 | length 113.5
  Top Layer w12: R11.1 LD1.K@3012.36,2776.69
NetLD2_K: LD2.K R14.1 | length 118.1
  Top Layer w12: R14.1 LD2.K@3138.35,2780.08
NetLD3_K: LD3.K R49.1 | length 126.4
  Top Layer w12: LD3.K 4535.98,330 R49.1
NetLD4_K: LD4.K R50.1 | length 118.7
  Top Layer w12: LD4.K@4287.4,397.09 R50.1
NetLD5_K: LD5.K R51.1 | length 121.5
  Top Layer w12: R51.1 3506.61,328.03 LD5.K
NetLD6_K: LD6.K R52.1 | length 127.1
  Top Layer w12: R52.1 3012.36,326.77 LD6.K
NetLD7_K: LD7.K R53.1 | length 130.9
  Top Layer w12: R53.1 2511.1,328.03 LD7.K
NetLD8_K: LD8.K R54.1 | length 134.8
  Top Layer w12: R54.1 2026.85,328.03 LD8.K
NetLD9_K: LD9.K R55.1 | length 124.6
  Top Layer w12: R55.1 1534.72,328.03 LD9.K
NetLD10_K: LD10.K R56.1 | length 133.6
  Top Layer w12: R56.1 890.47,276.14 LD10.K@917.32,276.14
NetLD11_K: LD11.K R57.1 | length 136.6
  Top Layer w12: LD11.K 409.45,318.9 R57.1
NetLD12_K: LD12.K R61.2 | length 102.4
  Top Layer w12: R61.2 LD12.K
NetO1_2: O1.2 R22.2 | length 117.6
  Top Layer w12: O1.2 R22.2@2788.98,1683.94
NetO1_4: O1.4 R25.2 | length 117.6
  Top Layer w12: O1.4 R25.2@2688.98,1683.94
NetO1_6: O1.6 R27.2 | length 117.6
  Top Layer w12: O1.6 R27.2@2588.98,1683.94
NetO1_8: O1.8 R29.2 | length 117.9
  Top Layer w12: O1.8 R29.2@2488.98,1684.25
NetO2_2: O2.2 R37.2 | length 119.1
  Top Layer w12: O2.2 R37.2@2136.61,1682.05
NetO2_4: O2.4 R40.2 | length 119.1
  Top Layer w12: O2.4 R40.2@2036.61,1682.05
NetO2_6: O2.6 R42.2 | length 119.1
  Top Layer w12: O2.6 R42.2@1936.61,1682.05
NetO2_8: O2.8 R44.2 | length 119.1
  Top Layer w12: O2.8 R44.2@1836.61,1682.05
NetO3_2: O3.2 R60.2 | length 219.9
  Top Layer w16: R60.2 2968.74,1684.17 3028.74,1624.17 O3.2
NetO3_3: O3.3 R58.2 | length 1591.3
  Top Layer w20: O3.3 3028.74,1235.04 3059.06,1204.72 3244.09,1204.72 3464.57,984.25 4244.09,984.25 4339.84,1080 R58.2
NetR12_1: R12.1 SP1.2 | length 140
  Top Layer w20: R12.1 SP1.2@3538.74,1384.17
NetR12_2: R12.2 T1.3 | length 153.6
  Top Layer w20: T1.3 3308.74,1464.17 R12.2
NetR17_1: R17.1 U1.28 | length 138.3
  Top Layer w9: R17.1 1878.74,2144.17 1904.69,2170.12 U1.28
NetR19_1: R19.1 Z13.1 | length 136.8
  Top Layer w12: Z13.1@3439.37,1637.8 3439.37,1670.39 R19.1
NetR20_1: R20.1 Z13.2 | length 194.9
  Top Layer w12: Z13.2@3539.37,1637.8 3594.49,1692.91 3639.06,1692.91 R20.1
NetR23_2: R23.2 R33.2 U2.3 | length 333.6
  Top Layer w12: R23.2 R33.2 3253.74,979.17 3300.67,979.17 3345.67,934.17 U2.3
NetR24_2: R24.2 R32.2 U2.6 | length 731.1
  Top Layer w12: R24.2 2588.74,1109.17 R32.2 2608.74,929.17 2998.39,929.17 U2.6
NetR26_2: R26.2 R31.2 U2.11 | length 792.5
  Top Layer w12: R26.2@2808.74,1124.17 2808.74,1024.17 2873.74,959.17 3058.74,959.17 3098.43,919.49 3098.43,751.18 3045.67,698.43 U2.11
NetR28_2: R28.2 R30.2 U2.14 | length 924.6
  Top Layer w12: R28.2 2983.74,1109.17 R30.2 2953.74,979.17 3083.74,979.17 3118.74,944.17 3263.74,944.17 3298.74,909.17 3298.74,844.17 3345.67,797.24 U2.14
NetR34_2: R34.2 R35.1 R62.2 U3.5 | length 800.7
  Top Layer w12: U3.5 831.88,1678.34 846.46,1692.91 1023.62,1692.91 1122.05,1791.34 1321.42,1791.34 1359.53,1753.23 R34.2
NetR38_2: R38.2 R48.2 U4.3 | length 353.9
  Top Layer w12: U4.3 2208.5,954.17 2253.74,954.17 R48.2 R38.2
NetR39_2: R39.2 R47.2 U4.6 | length 363.3
  Top Layer w12: R39.2 R47.2 1703.74,969.17 1758.39,969.17 U4.6
NetR41_2: R41.2 R46.2 U4.11 | length 588.1
  Top Layer w12: U4.11 1840.94,703.15 1893.7,755.91 1893.7,924.13 1938.74,969.17 R46.2 R41.2
NetR43_2: R43.2 R45.2 U4.14 | length 625.1
  Top Layer w12: R43.2 2033.74,1054.17 R45.2 2033.74,993.82 2088.74,938.82 2088.74,834.17 2140.94,781.97 U4.14
NetR58_1: R58.1 R59.2 T2.1 | length 192.9
  Top Layer w30: R58.1 4519.69,1000 ; R59.2 4519.69,1000 ; T2.1 4519.69,1000
RESET: C1.2 J1.2 R3.1 U1.7 | length 1082.4
  Top Layer w10: C1.2@1743.74,2859.17 R3.1 1943.74,2754.17 ; J1.2 1913.94,2589.37 1943.74,2619.17 1943.74,2754.17 ; v1(2003.74,2794.17) 1963.74,2754.17 1943.74,2754.17 ; v1(2078.74,2794.17) 2113.74,2759.17 2113.74,2584.17 2133.74,2564.17 2198.74,2564.17 2227.05,2535.87 U1.7
  Bottom Layer w10: v1(2003.74,2794.17) v1(2078.74,2794.17)
RESET_R: M1.1 U1.27 | length 824.1
  Top Layer w9: M1.1 1305.04,2050.47 1413.74,2159.17 1688.74,2159.17 1719.37,2189.8 U1.27
RXD0: R20.2 U1.43 | length 1498
  Top Layer w10: U1.43 2246.73,1956.18 2296.74,1906.17 2941.74,1906.17 3064.45,1783.46 3570.87,1783.46 R20.2
SCL: F1.2 R9.1 U1.58 | length 1229.5
  Top Layer w10: U1.58 2938.11,2268.54 v1(3018.74,2349.17) ; v1(3133.74,2234.17) 3183.74,2234.17 3288.74,2339.17 R9.1 F1.2
  Bottom Layer w10: v1(3018.74,2349.17) v1(3133.74,2234.17)
SDA: F2.2 R10.1 U1.59 | length 1479.4
  Top Layer w10: U1.59 2902.8,2288.23 3008.74,2394.17 v1(3058.74,2394.17) ; v1(3178.74,2274.17) 3308.74,2404.17 3578.74,2404.17 R10.1 F2.2
  Bottom Layer w10: v1(3058.74,2394.17) v1(3178.74,2274.17)
SIL: R60.1 U1.41 | length 819.6
  Top Layer w10: U1.41 2207.36,1935.55 2272.74,1870.17 2782.74,1870.17 R60.1
SPI1_MISO: M1.13 U1.22 | length 2561
  Top Layer w9: M1.13 336.26,2286.69 268.74,2219.17 268.74,1989.17 423.74,1834.17 923.74,1834.17 1058.74,1969.17 1343.74,1969.17 v1(1498.74,2124.17) ; v1(1498.74,2339.17) 1549.69,2288.23 U1.22
  Bottom Layer w10: v1(1498.74,2124.17) v1(1498.74,2339.17)
SPI1_MOSI: M1.14 U1.23 | length 2423.3
  Top Layer w9: M1.14 352.52,2207.95 293.74,2149.17 293.74,1999.17 438.74,1854.17 913.74,1854.17 1048.74,1989.17 1318.74,1989.17 v1(1453.74,2124.17) ; v1(1453.74,2339.17) 1453.74,2338.82 1524.01,2268.54 U1.23
  Bottom Layer w10: v1(1453.74,2124.17) v1(1453.74,2339.17)
SPI1_SCK: M1.12 U1.21 | length 2690.1
  Top Layer w9: M1.12 340,2365.43 243.74,2269.17 243.74,1974.17 403.74,1814.17 938.74,1814.17 1068.74,1944.17 1363.74,1944.17 v1(1543.74,2124.17) ; v1(1543.74,2339.17) 1575,2307.91 U1.21
  Bottom Layer w10: v1(1543.74,2124.17) v1(1543.74,2339.17)
SWCLK: R21.1 U1.49 Z12.3 | length 1641.1
  Top Layer w9: U1.49 2653.74,2091.38 2800.95,1944.17 2953.74,1944.17 3076.74,1821.17 3315.74,1821.17 3358.74,1864.17 3358.74,1994.17 3373.74,2009.17 3625.94,2009.17 R21.1
  Top Layer w12: Z12.3@3629.92,1858.27 3629.92,1931.81 R21.1
SWDIO: R18.1 U1.46 Z12.1 | length 1371.4
  Top Layer w9: U1.46 2305.79,1962.13 2344.24,1923.67 2949.24,1923.67 3068.74,1804.17 3328.74,1804.17 3383.74,1859.17 3429.92,1859.17 Z12.1
  Top Layer w10: R18.1 3429.92,1955.91 Z12.1@3429.92,1859.17
TEST1: TT1.1 U1.15 | length 803.3
  Top Layer w9: TT1.1 1523.74,2664.17 1693.74,2494.17 1993.74,2494.17 2033.74,2534.17 2063.74,2534.17 2069.57,2528.35 U1.15
TEST2: TT2.1 U1.16 | length 820.6
  Top Layer w9: TT2.1 1413.74,2679.17 1617.68,2475.24 U1.16
TXD0: R19.2 U1.42 | length 1346.5
  Top Layer w10: U1.42 2227.05,1945.87 2284.74,1888.17 2928.74,1888.17 3072.82,1744.09 R19.2
V24: D1.A FF1.CB | length 273.1
  Top Layer w40: FF1.CB 283.46,929.13 381.89,1027.56 D1.A
VC3: C4.2 C5.2 C6.2 C7.2 C8.2 C9.1 C10.2 C11.2 C19.2 LD1.A LD2.A M1.8 O1.1 O1.3 O1.5 O1.7 O2.1 O2.3 O2.5 O2.7 O3.1 R1.2 R2.1 R3.2 R5.1 R6.1 R7.1 R8.1 R9.2 R10.2 R13.2 R15.2 R18.2 SP1.1 U1.13 U1.19 U1.32 U1.48 U1.64 Z10.2 Z12.4 Z13.4 ZZ1.2 | length 14221.1
  Top Layer w9: R3.2 1663.74,2709.17 1843.74,2529.17 1948.74,2529.17 C10.2 2043.74,2599.17 2108.94,2533.98 U1.13 2108.94,2398.98 2160.63,2347.28 ; C8.2 1810.63,2347.28 U1.19 2160.63,2347.28 ; C19.2 1873.74,2049.17 1915.95,2091.38 U1.32 2120.95,2091.38 ; 2193.74,2164.17 2298.74,2164.17 2345.16,2117.76 U1.48 2462.36,2002.8 2473.74,2014.17 C9.1 ; 2193.74,2289.17 2193.74,2339.17 ; 2268.74,2386.65 2241.22,2386.65 2193.74,2339.17 ; C4.2 2743.74,2524.17 2743.74,2504.17 R13.2 ; 2160.63,2347.28 2168.74,2339.17 2193.74,2339.17
  Top Layer w10: R9.2 3483.74,2299.17 3483.74,2185 Z10.2 Z10.2@3538.74,2140.94 ; 3683.74,2054.17 3683.74,2299.17 R10.2
  Top Layer w12: R1.2 1643.74,2079.17 1788.74,1934.17 ; R18.2 3497.32,1922.52 3480.31,1905.51 3480.31,1834.65 3507.87,1807.09 3678.74,1807.09 Z12.4@3729.92,1858.27
  Top Layer w16: M1.8 1321.26,2601.65 1358.74,2564.17 R2.1 ; 1886.61,1474.17 O2.7 ; 1983.74,1474.17 1986.61,1477.05 O2.5 ; 2086.61,1477.05 O2.3 ; 2186.61,1476.3 O2.1 ; 2538.98,1474.41 O1.7 ; 2638.74,1474.17 2638.98,1474.41 O1.5 ; 2738.98,1474.41 O1.3 ; 2838.98,1474.41 O1.1 ; 3078.74,1474.17 O3.1
  Top Layer w20: 2268.74,2386.65 2341.22,2386.65 2433.74,2479.17 2433.74,2549.17 2473.74,2589.17 C11.2 2658.74,2589.17 C4.2 2940.2,2870.63 LD1.A 3011.81,2874.02 LD2.A 3688.9,2874.02 3783.74,2779.17 3783.74,2504.17 3753.74,2474.17 R5.1 R6.1 R7.1 R8.1
  Top Layer w30: v2(873.74,1764.17) 983.74,1764.17 1053.74,1834.17 1588.74,1834.17 ZZ1.2 1653.74,1799.17 1788.74,1934.17 1893.74,1934.17 2038.74,2079.17 2108.74,2079.17 2120.95,2091.38 2193.74,2164.17 2193.74,2289.17
  Top Layer w40: v2(873.74,1954.17) 873.74,2599.17 ; C5.2 873.74,2599.17 ; M1.8 876.22,2601.65 873.74,2599.17 ; ZZ1.2 1733.74,1769.17 1753.74,1749.17 1753.74,1514.17 1793.74,1474.17 1886.61,1474.17 1983.74,1474.17 2638.74,1474.17 3078.74,1474.17 3138.74,1474.17 3318.74,1294.17 3606.22,1294.17 SP1.1 3701.22,1516.65 3733.74,1549.17 Z13.4 3768.74,1669.17 3768.74,1824.17 Z12.4 3763.74,1889.17 3763.74,2004.17 3713.74,2054.17 3683.74,2054.17 3343.74,2054.17 3308.74,2019.17 3308.74,1934.17 3288.74,1914.17 R15.2 ; 3533.27,2054.17 Z10.2
  Bottom Layer w30: v2(873.74,1764.17) v2(873.74,1954.17)
Z24V: D2.K FF1.B LD3.A LD4.A LD5.A LD6.A LD7.A LD8.A LD9.A LD10.A LD11.A LD12.A O1.10 O1.12 O1.14 O1.16 O2.10 O2.12 O2.14 O2.16 O3.4 PK1.2 U2.1 U2.8 U4.1 U4.8 Z1.1 Z2.1 Z3.1 Z4.1 Z5.1 Z6.1 Z7.1 Z8.1 ZZ.1 | length 14746.2
  Top Layer w12: LD11.A 629.92,299.21 ; LD10.A 921.26,645.67 ; LD9.A 1767.72,275.59 ; LD8.A 2255.91,279.53 ; LD7.A 2748.03,279.53 ; LD6.A 3244.09,287.4 ; LD5.A 3732.28,291.34 3736.22,295.28 ; LD4.A 4385.83,295.28 4389.76,299.21
  Top Layer w16: O2.10 1886.61,1347.05 1918.74,1379.17 2418.74,1379.17 3058.74,1379.17 3078.74,1359.17 O3.4 ; O2.12 1986.61,1377.05 ; O2.14 2086.61,1377.05 ; O2.16 2186.61,1376.3 ; O1.10 2538.98,1378.94 ; O1.12 2638.98,1378.94 ; 2738.74,1374.17 2738.98,1373.94 O1.14 ; O1.16 2838.98,1378.94
  Top Layer w20: U4.1 2418.74,964.41 2418.74,1379.17
  Top Layer w40: 4389.76,625.98 4401.57,637.8 4401.57,645.67 ; 4700.79,645.67 4700.79,1350.39 PK1.2
  Top Layer w60: FF1.B 283.46,610.24 326.77,566.93 637.8,566.93 ; 1515.75,464.57 1515.75,653.54 1640.94,778.74 U4.8 ; U4.1 2340.94,773.23 2480.32,633.86 2480.32,464.57 ; 2751.97,429.13 2751.97,444.88 2751.97,448.82 2751.97,692.91 2845.67,786.61 U2.8 ; U2.1 3545.67,788.98 3811.02,523.62 3818.9,523.62
  Top Layer w100: Z8.1 1275.59,228.35 1366.14,318.9 1366.14,523.62 ; Z7.1 1767.72,275.59 1767.72,429.13 ; Z6.1 2259.84,429.13 ; Z5.1 2751.97,429.13 ; Z4.1 3244.09,287.4 3244.09,429.13 ; Z3.1 3736.22,295.28 3736.22,440.94 ; Z2.1 4334.65,110.24 4389.76,165.35 4389.76,299.21 4389.76,625.98
  Top Layer w150: ZZ.1 637.8,566.93 716.54,645.67 921.26,645.67 1244.09,645.67 1366.14,523.62 1440.94,448.82 2751.97,448.82 ; 2751.97,444.88 3740.16,444.88 ; 3736.22,440.94 3740.16,444.88 ; Z1.1 4720.47,578.74 4653.54,645.67 4401.57,645.67 3940.94,645.67 3818.9,523.62 3740.16,444.88
pads on no net: J1.0 M1.3 M1.4 M1.5 M1.6 M1.7 M1.16 MM1. MM4. MM5. MM8. PK1.3 U1.1 U1.2 U1.3 U1.4 U1.8 U1.9 U1.10 U1.11 U1.14 U1.17 U1.20 U1.25 U1.29 U1.30 U1.44 U1.45 U1.62 U2.10 U2.15 U3.2 U3.6 U4.10 U4.15 X1.2 X1.4

## Polygon pours and split planes (outlines as drawn)
VC3 on Top Layer "Keep-Out Layer-No Net" (solid, pour order 2): 1988.74,2449.17 1988.74,2029.17 2413.74,2029.17 2402.7,2039.81 2402.7,2449.17
GND on Bottom Layer "Keep-Out Layer-No Net" (solid, pour order 4): 19.69,787.4 610.24,787.4 1043.31,1220.47 3956.69,1220.47 3956.69,3208.66 807.09,3208.66 807.09,2834.65 787.4,2814.96 19.69,2814.96

## Silkscreen, mask and mechanical layers (free items; w line width, h text height)
Top Overlay:
  lines w7.87: 925.2,1732.28 984.25,1732.28 1093.36,1732.28 1141.1,1684.54 ; 1122.05,1437.01 1139.84,1454.8 1139.84,1514.12 ; 3503.94,3031.5 3503.94,3070.87 3700.79,3070.87 3700.79,3031.5
  text "CHANNEL" at 3484.25,3090.55 h40
  text "SETUP" at 3425.2,3031.5 h40 r90
  text "LED1" at 3031.5,3011.81 h45 r90
  text "LED2" at 3149.61,3011.81 h45 r90
  text "1" at 3818.9,2952.76 h45
  text "KEY1" at 2778.74,2664.17 h45
  text "KEY2" at 3088.74,2239.17 h45
  text "1" at 3328.74,2119.17 h45
  text "WYSW" at 3858.27,2047.24 h45 r90
  text "1" at 3338.74,1844.17 h45
  text "SWD" at 3858.27,1811.02 h45 r90
  text "1" at 3343.74,1734.17 h45
  text "SERIAL" at 3858.27,1496.06 h45 r90
  text "COMES" at 4863.74,1429.17 h45 r90
  text "STER-SZARPAK" at 4963.74,1424.17 h45 r90
  text "2019-03-16" at 5048.74,1424.17 h45 r90
Mechanical 1:
  the board outline again, w7.87
Mechanical 3:
  lines w7.87: 0,472.44 5157.48,472.44 ; 0,2755.91 5157.48,2755.91

## Text inside footprints (layer, text, board x,y; h text height)
M1: Top Overlay "1" at 1104.65,2043.02 h45 r90